# Allegro board CARLA_PCB_1p2.brd
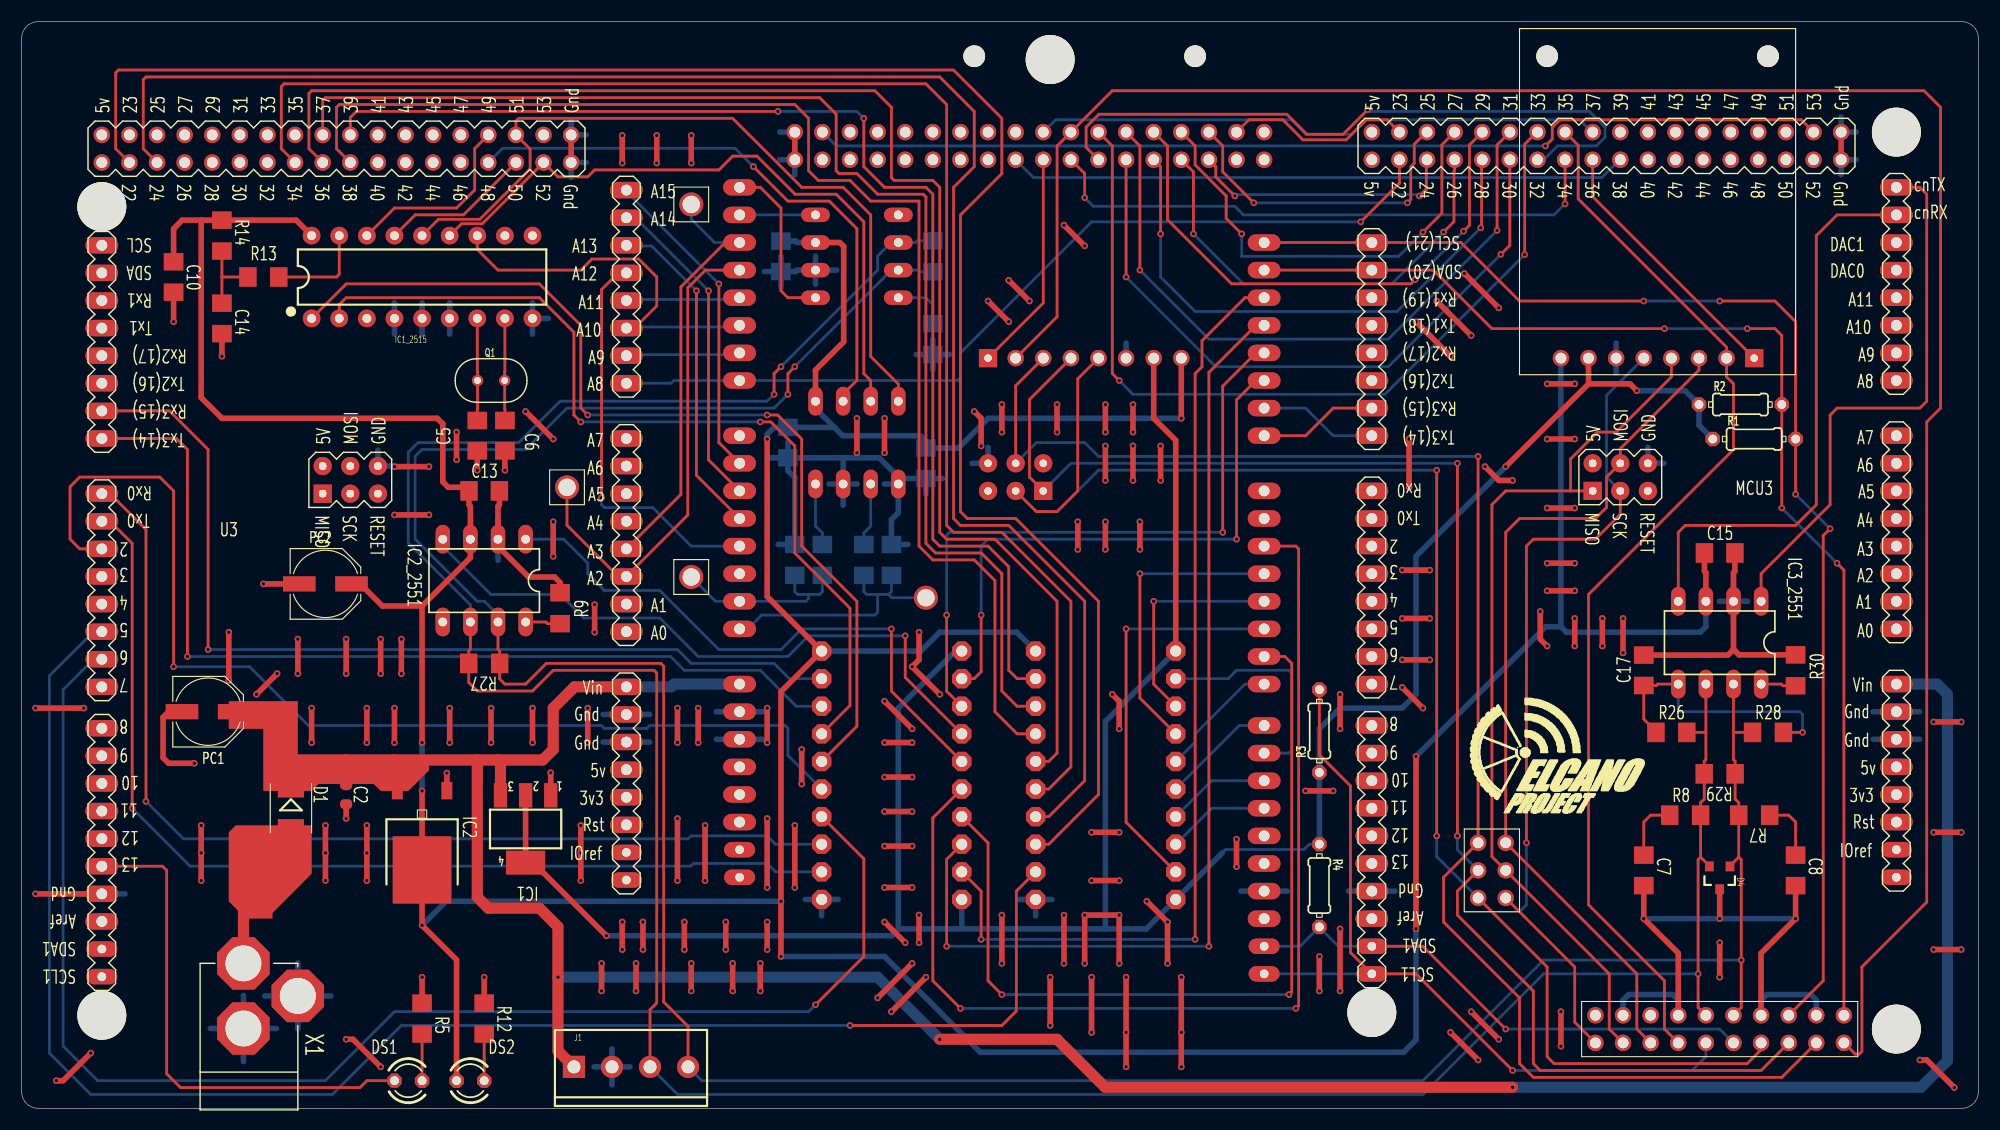
[diagram p0: board, top side]
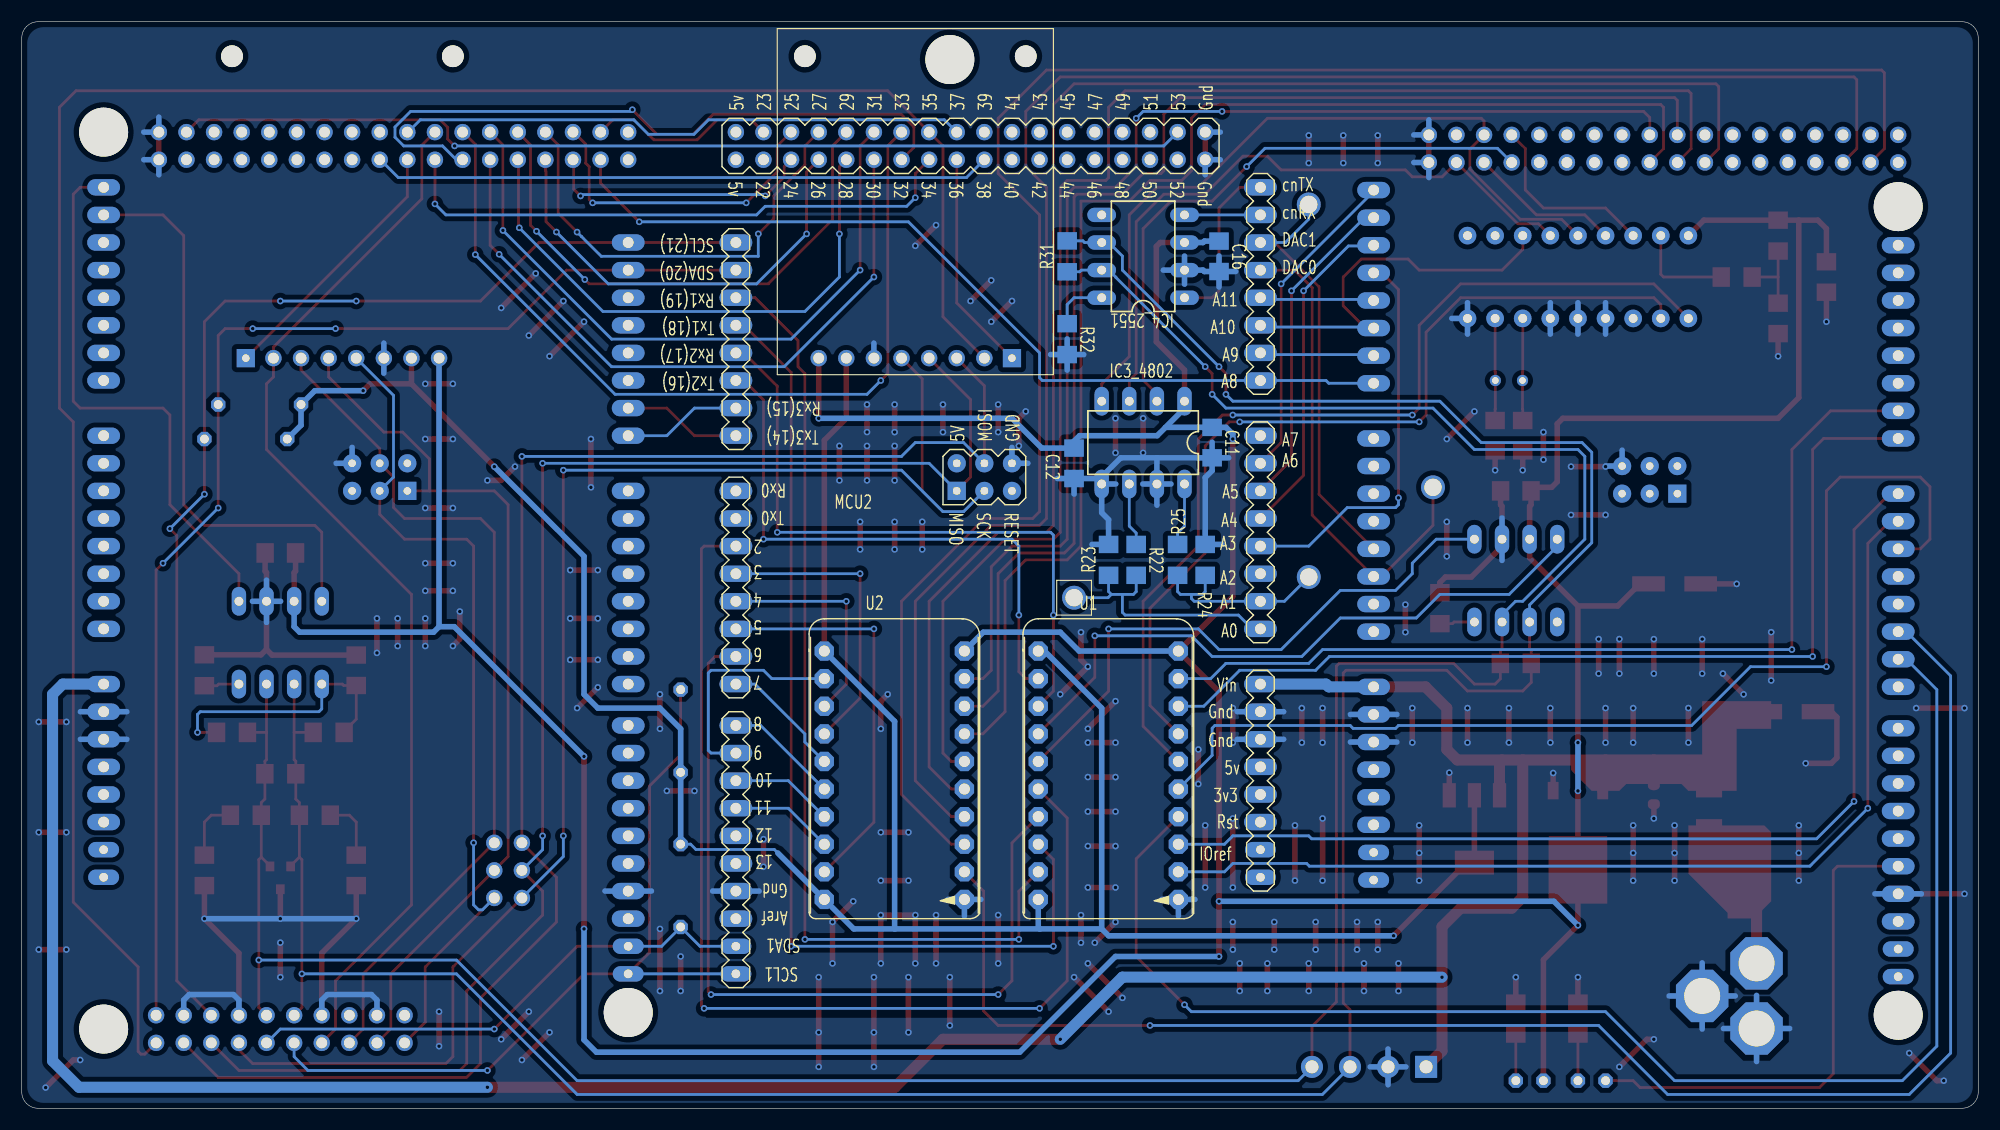
[diagram p1: board, bottom side, seen from below]

Outline 180 x 100 mm; copper layers: TOP, BOTTOM. Coordinates in mm from the lower left corner of the outline.
Outline path: 0,98.5 0,1.5 arc(0.44,0.44) 1.5,0 178.5,0 arc(179.56,0.44) 180,1.5 180,98.5 arc(179.56,99.56) 178.5,100 1.5,100 arc(0.44,99.56) 0,98.5

## Design rules (mm)
constraint set DEFAULT: min track width 0.254
net group OSCILLATOR: nets OSC1 OSC2
net group SPI_SIGNALS: nets CAN_SS DAC_SS
net group POWER: nets 12V0
nets with their own width: min track width 0.254; nets BRAKE_ON BRAKE_PWM BUZZER CAN_INT CAN_RXD CAN_TXD CANH CANL CS_C5_FRONT CS_C5_REAR CS_GYRO CS_MOUSE D_36 DACA DACB DEBUG_LED DRDY_C DRDY_G EBIKECONTRL EN ESTOP_INT FIX FWDSW GPS_RX GPS_TX HALLPHASEA HALLPHASEB HALLPHASEC I1 I2 INT1 L_SENSE LED LL_SCK MISO MOSI N00469 N35866 N35982 N35986 NPD PPS R_BRAKE_ON R_BRAKE_PWM R_BUZZER R_D_36 R_DACA R_DACB R_FWDSW R_REGEN_ACTIVE R_REVERSE R_RX1 R_RX3 R_SENSE R_STEER_PWM R_TX1 R_TX3 R_VOLTAGE_SWITCH R_WATCHDOG REGEN_ACTIVE REVERSE RS RX0 RX3 SCL1 SDA1 SPEEDOMETER SPI_SS STEER_SERVO_PWM TX0 TX3 VOLTAGE_SWITCH WATCHDOG WHEELROTATION

## Placement (name value [footprint] x y rotation side)
C2  100n  [C0603-ROUND]  29.84 28.88 270 top
C5  33pF  [C1206]  41.91 61.9 270 top
C6  33pF  [C1206]  44.45 61.9 270 top
C7  560pF  [C1206]  149.22 21.89 270 top
C8  560pF  [C1206]  163.19 21.89 270 top
C10  0.1uF  [C1206]  13.97 76.5 270 top
C11  0.1uF  [C1206]  70.48 61.27 270 bottom
C12  0.1uF  [C1206]  83.19 59.36 270 bottom
C13  0.1uF  [C1206]  42.55 56.82 0 top
C14  0.1uF  [C1206]  18.41 72.69 270 top
C15  0.1uF  [C1206]  156.21 51.1 0 top
C16  0.1uF  [C1206]  69.85 78.41 270 bottom
C17  4700pF  [C1206]  149.22 40.31 90 top
D1  M7  [SMB]  24.77 27.61 270 top
D4  PESD1CAN  [SPARKFUN-DISCRETESEMI_SOT23-3]  156.21 21.26 180 top
DS1  N_A  [LED3MM]  35.56 2.54 0 top
DS2  N_A  [LED3MM]  41.27 2.54 0 top
IC1  MC33269ST-3.3T3G  [SOT223]  46.35 25.7 180 top
IC1_2515  MCP2515  [DIP18]  36.83 76.5 0 top
IC2  MC33269DT-5.0G  [DPACK]  36.83 24.43 180 top
IC2_2551  MCP2551DIL08  [IC-PACKAGE_DIL08]  42.55 48.56 180 top
IC3_2551  MCP2551DIL08  [IC-PACKAGE_DIL08]  156.21 42.85 180 top
IC3_4802  MCP4802  [DIL08]  76.83 61.27 0 bottom
IC4_2551  MCP2551DIL08  [IC-PACKAGE_DIL08]  76.83 78.41 90 bottom
J1  N_A  [SCREWTERMINAL-3_5MM-4]  50.8 3.81 0 top
J2  PicoScope  [HDR-2X10]  156.21 7.29 90 top
JP2  PINHD-2X3  [HDR-2X3]  135.25 21.89 0 top
MCU2  -  [DUE_NORMAL_]  83.82 68.25 90 bottom
MCU3  -  [DUE_NORMAL_]  154.69 68.25 90 top
NOREF  -  [unnamed]  124.21 8.81 0 top
NOREF#2  -  [unnamed]  94.61 96.52 0 top
NOREF#3  -  [unnamed]  7.37 82.98 0 top
NOREF#4  -  [unnamed]  172.47 7.29 0 top
NOREF#5  -  [unnamed]  7.37 8.56 0 top
NOREF#6  -  [unnamed]  172.47 89.84 0 top
PC1  47u  [PANASONIC_D]  17.14 36.5 0 top
PC2  47u  [PANASONIC_D]  27.94 48.26 0 top
Q1  16MHz  [XTAL_ECS-160-20-46X]  43.18 66.98 0 top
R1  4.7 k  [0204_7]  159.38 61.59 0 top
R2  4.7 k  [0204_7]  158.12 64.77 0 top
R3  4.7 k  [0204_7]  119.38 34.72 90 top
R4  4.7 k  [0204_7]  119.38 20.5 270 top
R5  1K  [R1206]  36.83 8.26 270 top
R7  100  [R1206]  159.38 26.98 180 top
R8  100  [R1206]  153.03 26.98 0 top
R9  4.7K  [R1206]  49.53 46.02 90 top
R12  1K  [R1206]  42.55 8.26 270 top
R13  1K  [R1206]  22.23 76.5 180 top
R14  20K  [R1206]  18.41 80.31 270 top
R22  2.2K  [R1206]  77.47 50.47 270 bottom
R23  3.3K  [R1206]  80.01 50.47 90 bottom
R24  2.2K  [R1206]  73.66 50.47 270 bottom
R25  3.3K  [R1206]  71.12 50.47 90 bottom
R26  60  [R1206]  151.76 34.59 0 top
R27  120  [R1206]  42.55 40.95 180 top
R28  60  [R1206]  160.66 34.59 0 top
R29  120  [R1206]  156.21 30.79 180 top
R30  4.7K  [R1206]  163.19 40.31 90 top
R31  120  [R1206]  83.82 78.41 90 bottom
R32  4.7K  [R1206]  83.82 70.79 270 bottom
SD1  Micro-SD-Breakout  [ADA-MICROSD]  150.5 99.36 270 top
SD2  Micro-SD-Breakout  [ADA-MICROSD]  97.79 99.36 270 bottom
TP0  -  [TH_TP]  50.16 57.15 0 top
TP1  -  [TH_TP]  61.59 83.19 0 top
TP3  -  [TH_TP]  83.19 46.99 180 bottom
TP4  -  [TH_TP]  61.59 48.9 0 top
U1  LLSHIFTER  [ELSHIFTER]  81.28 17.45 180 bottom
U2  LLSHIFTER  [ELSHIFTER]  100.97 17.45 180 bottom
U3  ADUMEGA2560  [MEGA2560]  37.85 68 90 top
X1  DC21MMX  [DC-21MM]  20.32 6.99 180 top

## Library data of the parts
C2 = C-EU_0603-RND
C5-C8 C10-C17 = C-US_C1206
D1 = DIODE-_SMB_0
D4 = PESD1CAN
DS1 DS2 = LED_3MM
IC1 = MC33269STJ_1
IC1_2515 = MCP2515PMCP2510F_P_0
IC2 = MC33269KJ_D_1
IC2_2551 IC3_2551 IC4_2551 = MCP2551_DIL08_0
IC3_4802 = DIL8
J1 = CONN_04_SCREW_0
J2 = Header-2x10_2
JP2 = PINHD-2X3_0
MCU2 MCU3 = DUEPNORMALF_1
PC1 PC2 = CPOL-EU_D_1
Q1 = ECS-160-20-46X
R1-R4 = R-US__0204B7
R5 R7-R9 R12-R14 R22-R32 = R-US__R1206
SD1 SD2 = Micro-SD-Breakout
TP0 TP1 TP3 TP4 = TH_TP_1
U1 U2 = ELSHIFTER
U3 = ADUMEGA2560_4
X1 = DC21MM_0

## Footprints (pads in the part's own frame, mm; a bottom-side part is the same pattern mirrored in y, then rotated)
0204_7
  rrect 1.321x1.321 hole 0.813: 1(-3.81,0) 2(3.81,0)
ADA-MICROSD
  round 2 hole 2 unplated: (2.54,10.16) (2.54,-10.16)
  rect 1.676x1.676 hole 0.7: 1(30.326,8.89)
  round 1.508 hole 1: 2(30.326,6.35) 3(30.326,3.81) 4(30.326,1.27) 5(30.326,-1.27) 6(30.326,-3.81) 7(30.326,-6.35) 8(30.326,-8.89)
C0603-ROUND
  custom 0.898x1.1 smd: 1(-0.889,0) 2(0.889,0)
C1206
  rect 1.6x1.8 smd: 1(-1.4,0) 2(1.4,0)
DC-21MM
  rrect 4.826x4.826 hole 3.302: 1(-5.08,-3.353) 2(-0.076,-6.35) 3(-0.076,-0.356)
DIL08
  oval 1.321x2.642 hole 0.813: 1(-3.81,-3.81) 2(-1.27,-3.81) 3(1.27,-3.81) 4(3.81,-3.81) 5(3.81,3.81) 6(1.27,3.81) 7(-1.27,3.81) 8(-3.81,3.81)
DIP18
  round 1.626 hole 0.813: 1(-10.16,-3.81) 2(-7.62,-3.81) 3(-5.08,-3.81) 4(-2.54,-3.81) 5(0,-3.81) 6(2.54,-3.81) 7(5.08,-3.81) 8(7.62,-3.81) 9(10.16,-3.81) 10(10.16,3.81) 11(7.62,3.81) 12(5.08,3.81) 13(2.54,3.81) 14(0,3.81) 15(-2.54,3.81) 16(-5.08,3.81) 17(-7.62,3.81) 18(-10.16,3.81)
DPACK
  rect 1x1.6 smd: 1(-2.28,-4.8) 3(2.28,-4.8)
  rect 5.4x6.2 smd: 2(0,2.5)
DUE_NORMAL_
  oval 1.508x3.016 hole 1: 2(-16.51,30.48) 3(-19.05,30.48) 3V3(-39.37,-17.78) 4(-21.59,30.48) 5(-24.13,30.48) 5V(-36.83,-17.78) 6(-26.67,30.48) 7(-29.21,30.48) 8(-33.02,30.48) 9(-35.56,30.48) 10(-38.1,30.48) 11(-40.64,30.48) 12(-43.18,30.48) 13(-45.72,30.48) A0(-24.13,-17.78) A1(-21.59,-17.78) A2(-19.05,-17.78) A3(-16.51,-17.78) A4(-13.97,-17.78) A5(-11.43,-17.78) A6(-8.89,-17.78) A7(-6.35,-17.78) A8(-1.27,-17.78) A9(1.27,-17.78) A10(3.81,-17.78) A11(6.35,-17.78) AREF(-50.8,30.48) CANRX(13.97,-17.78) CANTX(16.51,-17.78) DAC0(8.89,-17.78) DAC1(11.43,-17.78) GND1(-48.26,30.48) GND_1(-34.29,-17.78) GND_2(-31.75,-17.78) RESET(-41.91,-17.78) RX0(-11.43,30.48) RX1(6.35,30.48) RX2(1.27,30.48) RX3(-3.81,30.48) SCL(11.43,30.48) SDA(8.89,30.48) TX0(-13.97,30.48) TX1(3.81,30.48) TX2(-1.27,30.48) TX3(-6.35,30.48) VIN(-29.21,-17.78)
  round 1.508 hole 1: 5V_A(19.05,30.48) 5V_B(21.59,30.48) 22(19.05,27.94) 23(21.59,27.94) 24(19.05,25.4) 25(21.59,25.4) 26(19.05,22.86) 27(21.59,22.86) 28(19.05,20.32) 29(21.59,20.32) 30(19.05,17.78) 31(21.59,17.78) 32(19.05,15.24) 33(21.59,15.24) 34(19.05,12.7) 35(21.59,12.7) 36(19.05,10.16) 37(21.59,10.16) 38(19.05,7.62) 39(21.59,7.62) 40(19.05,5.08) 41(21.59,5.08) 42(19.05,2.54) 43(21.59,2.54) 44(19.05,0) 45(21.59,0) 46(19.05,-2.54) 47(21.59,-2.54) 48(19.05,-5.08) 49(21.59,-5.08) 50(19.05,-7.62) 51(21.59,-7.62) 52(19.05,-10.16) 53(21.59,-10.16) GND_A(19.05,-12.7) GND_B(21.59,-12.7)
  round 1.676 hole 0.7: 5V_ICSP(-8.89,10.16) GND_ICSP(-8.89,5.08) MOSI_ICSP(-8.89,7.62) RESET_ICSP(-11.43,5.08) SCK_ICSP(-11.43,7.62)
  oval 1.422x2.845 hole 0.8: IOREF(-44.45,-17.78) NC(-46.99,-17.78) SCL1(-55.88,30.48) SDA1(-53.34,30.48)
  rect 1.676x1.676 hole 0.7: MISO_ICSP(-11.43,10.16)
ELSHIFTER
  rrect 1.778x1.778 hole 1.016: 1(-5.2,24.63) 2(-5.2,22.09) 3(-5.2,19.55) 4(-5.2,17.01) 5(-5.2,14.47) 6(-5.2,11.93) 7(-5.2,9.39) 8(-5.2,6.85) 9(-5.2,4.31) 10(-5.2,1.77) 11(7.69,24.63) 12(7.69,22.09) 13(7.69,19.55) 14(7.69,17.01) 15(7.69,14.47) 16(7.69,11.93) 17(7.69,9.39) 18(7.69,6.85) 19(7.69,4.31) 20(7.69,1.77)
HDR-2X3
  round 1.508 hole 1: 1(-1.27,2.54) 2(1.27,2.54) 3(-1.27,0) 4(1.27,0) 5(-1.27,-2.54) 6(1.27,-2.54)
HDR-2X10
  round 1.508 hole 1: 1(-1.27,11.43) 2(1.27,11.43) 3(-1.27,8.89) 4(1.27,8.89) 5(-1.27,6.35) 6(1.27,6.35) 7(-1.27,3.81) 8(1.27,3.81) 9(-1.27,1.27) 10(1.27,1.27) 11(-1.27,-1.27) 12(1.27,-1.27) 13(-1.27,-3.81) 14(1.27,-3.81) 15(-1.27,-6.35) 16(1.27,-6.35) 17(-1.27,-8.89) 18(1.27,-8.89) 19(-1.27,-11.43) 20(1.27,-11.43)
IC-PACKAGE_DIL08
  oval 1.321x2.642 hole 0.813: 1(-3.81,-3.81) 2(-1.27,-3.81) 3(1.27,-3.81) 4(3.81,-3.81) 5(3.81,3.81) 6(1.27,3.81) 7(-1.27,3.81) 8(-3.81,3.81)
LED3MM
  rrect 1.321x1.321 hole 0.813: A(-1.27,0) K(1.27,0)
MEGA2560
  oval 1.508x3.016 hole 1: 2(-16.51,30.48) 3(-19.05,30.48) 3V3(-39.37,-17.78) 4(-21.59,30.48) 5(-24.13,30.48) 5V_1(-36.83,-17.78) 6(-26.67,30.48) 7(-29.21,30.48) 8(-33.02,30.48) 9(-35.56,30.48) 10(-38.1,30.48) 11(-40.64,30.48) 12(-43.18,30.48) 13(-45.72,30.48) 20(8.89,30.48) 21(11.43,30.48) A0(-24.13,-17.78) A1(-21.59,-17.78) A2(-19.05,-17.78) A3(-16.51,-17.78) A4(-13.97,-17.78) A5(-11.43,-17.78) A6(-8.89,-17.78) A7(-6.35,-17.78) A8(-1.27,-17.78) A9(1.27,-17.78) A10(3.81,-17.78) A11(6.35,-17.78) A12(8.89,-17.78) A13(11.43,-17.78) A14(13.97,-17.78) A15(16.51,-17.78) AREF(-50.8,30.48) GND_1(-34.29,-17.78) GND_2(-31.75,-17.78) GND_5(-48.26,30.48) RESET(-41.91,-17.78) RX0(-11.43,30.48) RX1(6.35,30.48) RX2(1.27,30.48) RX3(-3.81,30.48) TX0(-13.97,30.48) TX1(3.81,30.48) TX2(-1.27,30.48) TX3(-6.35,30.48) VIN(-29.21,-17.78)
  round 1.508 hole 1: 5V_2(19.05,30.48) 5V_3(21.59,30.48) 22(19.05,27.94) 23(21.59,27.94) 24(19.05,25.4) 25(21.59,25.4) 26(19.05,22.86) 27(21.59,22.86) 28(19.05,20.32) 29(21.59,20.32) 30(19.05,17.78) 31(21.59,17.78) 32(19.05,15.24) 33(21.59,15.24) 34(19.05,12.7) 35(21.59,12.7) 36(19.05,10.16) 37(21.59,10.16) 38(19.05,7.62) 39(21.59,7.62) 40(19.05,5.08) 41(21.59,5.08) 42(19.05,2.54) 43(21.59,2.54) 44(19.05,0) 45(21.59,0) 46(19.05,-2.54) 47(21.59,-2.54) 48(19.05,-5.08) 49(21.59,-5.08) 50(19.05,-7.62) 51(21.59,-7.62) 52(19.05,-10.16) 53(21.59,-10.16) GND_3(19.05,-12.7) GND_4(21.59,-12.7)
  round 1.676 hole 0.7: 5V_ICSP(-8.89,10.16) GND_ICSP(-8.89,5.08) MOSI_ICSP(-8.89,7.62) RESET_ICSP(-11.43,5.08) SCK_ICSP(-11.43,7.62)
  oval 1.422x2.845 hole 0.8: IOREF(-44.45,-17.78) NC(-46.99,-17.78) SCL(-55.88,30.48) SDA(-53.34,30.48)
  rect 1.676x1.676 hole 0.7: MISO_ICSP(-11.43,10.16)
PANASONIC_D
  rect 3x1.4 smd: +(2.4,0) -(-2.4,0)
R1206
  rect 1.6x1.8 smd: 1(-1.422,0) 2(1.422,0)
SCREWTERMINAL-3_5MM-4
  rect 2.032x2.032 hole 1.2: 1(0,0)
  round 2.032 hole 1.2: 2(3.5,0) 3(7,0) 4(10.5,0)
SMB
  rect 2.4x2.4 smd: A(2.2,0) C(-2.2,0)
SOT223
  rect 1.219x2.235 smd: 1(-2.311,-3.099) 2(0,-3.099) 3(2.311,-3.099)
  rect 3.6x2.2 smd: 4(0,3.099)
SPARKFUN-DISCRETESEMI_SOT23-3
  rect 0.8x0.9 smd: 1(-0.95,-1) 2(0.95,-1) 3(0,1.1)
TH_TP
  round 2.2 hole 1.6: 1(0,0)
unnamed
  round 4.5 hole 4.5 unplated: (0,0)
XTAL_ECS-160-20-46X
  round 1.03 hole 0.63: 1(-1.25,0) 2(1.25,0)

## Nets
3V3: IC1.2(VOUT2) IC1.4 R1.1 R2.1 R3.1 R4.1 SD1.7 SD2.7 U1.1 U1.10 U2.1 U2.10
5V0: C10.1 C11.1 C12.1 C13.1 C15.1 C16.1 DS2.A IC1_2515.18 IC2.2(VOUT) IC2_2551.3 IC3_2551.3 IC3_4802.1 IC4_2551.3 PC2.+ R14.1 SD1.8 SD2.8 U1.11(VCCB) U2.11(VCCB)
12V0: C2.1 D1.C IC1.3 IC2.3 J1.1 MCU2.VIN MCU3.VIN PC1.+ U3.VIN
GND: C2.2 C5.2 C6.2 C7.2 C8.2 C10.2 C11.2 C12.2 C13.2 C14.2 C15.2 C16.2 C17.2 D4.3 IC1.1 IC1_2515.4 IC1_2515.5 IC1_2515.6 IC1_2515.9(VSS) IC2.1 IC2_2551.2(VSS) IC3_2551.2(VSS) IC3_4802.5 IC3_4802.7 IC4_2551.2(VSS) J1.2 J2.4 J2.8 J2.14 J2.18(GND4) MCU2.GND1 MCU2.GND_1 MCU2.GND_2 MCU2.GND_A MCU2.GND_B MCU2.GND_ICSP MCU3.GND1 MCU3.GND_1 MCU3.GND_2 MCU3.GND_A MCU3.GND_B MCU3.GND_ICSP PC1.- PC2.- R5.1 R9.2 R12.1 R23.2 R25.2 R30.2 R32.2 SD1.6(GND) SD2.6(GND) U1.20 U2.20 U3.GND_1 U3.GND_2 U3.GND_3 U3.GND_4 U3.GND_5 U3.GND_ICSP X1.1 X1.3
BRAKE_ON: U2.12 U3.39
BRAKE_PWM: U1.16 U3.2
BUZZER: U2.14 U3.38
CAN_INT: IC1_2515.12 MCU2.A10 U3.A10
CAN_RXD: IC1_2515.2 U1.14
CAN_SS: IC1_2515.16 U3.49
CAN_TXD: IC1_2515.1 U1.15
CAN_VREF: C17.1 IC3_2551.5 R26.1 R28.2
CANH: D4.1 IC2_2551.7 IC3_2551.7 IC4_2551.7 J1.4 J2.12 R7.2 R27.1 R28.1 R29.1 R31.1
CANL: D4.2 IC2_2551.6 IC3_2551.6 IC4_2551.6 J1.3 J2.10 R8.2 R26.2 R27.2 R29.2 R31.2
CD_HL: MCU3.36 SD1.1
CD_ROUTER: MCU2.36 SD2.1
CS_C5_FRONT: MCU2.37 MCU3.37
CS_C5_REAR: MCU2.38 MCU3.38
CS_GYRO: MCU2.25 MCU3.25
CS_MOUSE: MCU2.32 MCU3.32
CS_SD_HL: J2.7 MCU3.35 SD1.2
CS_SD_ROUTER: J2.19 MCU2.35 SD2.2
D_36: U2.15 U3.36
DAC_SS: IC3_4802.2 U3.48
DACA: IC3_4802.8 R24.1
DACB: IC3_4802.6 R22.1
DEBUG_LED: DS1.A U3.13
DRDY_C: MCU2.26 MCU3.26
DRDY_G: MCU2.24 MCU3.24
EBIKECONTRL: MCU2.A4 U3.A13
EN: MCU2.31 MCU3.31
ESTOP_INT: MCU2.A9 U3.A9
FIX: MCU2.30 MCU3.30
FWDSW: U2.16 U3.34
GPS_RX: MCU2.RX3 MCU3.TX3
GPS_TX: MCU2.TX3 MCU3.RX3
HALLPHASEA: MCU2.A6 U3.A15
HALLPHASEB: MCU2.A5 U3.A14
HALLPHASEC: MCU2.A3 U3.A12
HL-CANRX: IC3_2551.4 MCU3.CANRX
HL-CANTX: IC3_2551.1 MCU3.CANTX
I1: MCU2.27 MCU3.27
I2: MCU2.28 MCU3.28
INT1: MCU2.23 MCU3.23
L_SENSE: MCU2.DAC0 TP0.1 U3.A2
LED: MCU2.34 MCU3.34
LL-CANRX: IC2_2551.4 U1.4
LL-CANTX: IC2_2551.1 U1.5
LL_SCK: IC1_2515.13 IC3_4802.3 U3.52
MISO: IC1_2515.15 U3.50
MISO_HL: J2.3 JP2.4 MCU3.MISO_ICSP SD1.4
MISO_ROUTER: J2.15 JP2.3 MCU2.MISO_ICSP SD2.4
MOSI: IC1_2515.14 IC3_4802.4 U3.51
MOSI_HL: J2.5 JP2.2 MCU3.MOSI_ICSP SD1.3
MOSI_ROUTER: J2.17 JP2.1 MCU2.MOSI_ICSP SD2.3
NPD: MCU2.33 MCU3.33
OSC1: C6.1 IC1_2515.8 Q1.2
OSC2: C5.1 IC1_2515.7 Q1.1
PPS: MCU2.29 MCU3.29
PWRIN: D1.A X1.2
R_BRAKE_ON: MCU2.9 U2.2
R_BRAKE_PWM: MCU2.2 U1.6
R_BUZZER: MCU2.3 U2.4
R_D_36: MCU2.7 U2.5
R_DACA: MCU2.A1 R24.2 R25.1 TP4.1
R_DACB: MCU2.A0 R22.2 R23.1 TP3.1
R_FWDSW: MCU2.8 U2.6
R_REGEN_ACTIVE: MCU2.11 U2.8
R_REVERSE: MCU2.10 U2.7
R_RX1: MCU2.RX1 U1.9
R_RX3: MCU2.RX2 U1.3
R_SENSE: MCU2.DAC1 TP1.1 U3.A3
R_STEER_PWM: MCU2.6 U1.7
R_TX1: MCU2.TX1 U1.8
R_TX3: MCU2.TX2 U1.2
R_VOLTAGE_SWITCH: MCU2.4 U2.3
R_WATCHDOG: MCU2.5 U2.9
REGEN_ACTIVE: U2.18 U3.22
REVERSE: U2.17 U3.24
RS: IC1_2515.17 R13.1
RT-CANRX: IC4_2551.4 MCU2.CANRX
RT-CANTX: IC4_2551.1 MCU2.CANTX
RX0: U1.18 U3.RX0
RX3: U1.12 U3.RX3
SCK_HL: J2.1 JP2.6 MCU3.SCK_ICSP SD1.5
SCK_ROUTER: J2.13 JP2.5 MCU2.SCK_ICSP SD2.5
SCL: J2.16 MCU2.SCL MCU3.SCL R1.2
SCL1: J2.9 MCU2.SCL1 MCU3.SCL1 R3.2
SDA: J2.20 MCU2.SDA MCU3.SDA R2.2
SDA1: J2.11 MCU2.SDA1 MCU3.SDA1 R4.2
SPEEDOMETER: MCU2.A11 U3.A11
SPI_SS: MCU2.53 MCU3.53
STEER_SERVO_PWM: U1.17 U3.6
TX0: U1.19 U3.TX0
TX3: U1.13 U3.TX3
VOLTAGE_SWITCH: U2.13 U3.37
WATCHDOG: U2.19 U3.5
WHEELROTATION: MCU2.A8 MCU3.22 U3.A8
N00469: C14.1 R13.2 R14.2
N00471: DS2.K(C) R12.2
N00472: DS1.K(C) R5.2
N35866: IC2_2551.8 R9.1
N35982: C8.1 R7.1
N35986: C7.1 R8.1
N38622: IC3_2551.8 R30.1
N38835: IC4_2551.8 R32.1

Pads without a net: IC1_2515 3 10 11; IC2_2551 5; IC4_2551 5; J2 2 6; MCU2 3V3 5V 5V_A 5V_B 5V_ICSP 12 13 22 39 40 41 42 43 44 45 46 47 48 49 50 51 52 A2 A7 AREF IOREF NC RESET RESET_ICSP RX0 TX0; MCU3 2 3 3V3 4 5 5V 5V_A 5V_B 5V_ICSP 6 7 8 9 10 11 12 13 39 40 41 42 43 44 45 46 47 48 49 50 51 52 A0 A1 A2 A3 A4 A5 A6 A7 A8 A9 A10 A11 AREF DAC0 DAC1 IOREF NC RESET RESET_ICSP RX0 RX1 RX2 TX0 TX1 TX2; U3 3 3V3 4 5V_1 5V_2 5V_3 5V_ICSP 7 8 9 10 11 12 20 21 23 25 26 27 28 29 30 31 32 33 35 40 41 42 43 44 45 46 47 53 A0 A1 A4 A5 A6 A7 AREF IOREF MISO_ICSP MOSI_ICSP NC RESET RESET_ICSP RX1 RX2 SCK_ICSP SCL SDA TX1 TX2

## Via types
v1: diameter 0.61, hole 0.33, TOP to BOTTOM, 353 vias

## Routing (per net, layer and track width the routed paths; a pad name or vN(x,y) marks a point on that pad's centre or on a via; arc(x,y) is an arc through that point)
3V3: length 245.6
  TOP w0.508: U2.1 106.17,61.48 104.14,63.5 104.14,69.04 ; 144.15,66.67 147.96,66.67 v1(148.59,66.04) ; 144.15,66.67 v1(136.52,59.05) ; 144.15,66.67 144.15,69.04 ; v1(53.79,15.88) 47.05,22.61 IC1.4 IC1.2
  BOTTOM w0.254: 110.44,23.5 110.76,23.82 117.97,23.82 118.47,24.31 R4.1
  BOTTOM w0.508: 99.69,16.51 86.36,16.51 ; 99.69,16.51 99.69,35.61 U2.1 ; 99.69,16.51 103.45,16.51 U2.10 110.44,23.5 ; 86.36,16.51 86.48,16.63 U1.10 ; 86.36,16.51 80.64,16.51 ; R1.1 154.31,62.87 R2.1 153.03,66.04 v1(148.59,66.04) ; 80.64,16.51 80.01,15.88 v1(53.79,15.88) ; 80.64,16.51 80.64,36.83 85.89,42.08 U1.1 ; v1(136.52,59.05) 128.27,50.8 128.27,38.1 127,36.83 121.28,36.83 119.38,34.92 R3.1 R4.1
5V0: length 458.7
  TOP w0.508: v1(36.83,33.66) 36.83,46.23 ; 36.83,46.23 33.17,46.23 31.14,48.26 PC2.+ ; 36.83,46.23 41.27,50.67 IC2_2551.3 41.27,55.41 41.15,55.54 C13.1 40.81,57.15 39.24,57.15 38.73,57.66 38.73,62.99 38.23,63.5 18.41,63.5 16.51,65.41 16.51,81.74 ; v1(68.58,61.59) 68.58,47.09 U1.11 69.85,38.34 v1(69.85,19.05) v1(69.85,13.97) ; C10.1 13.97,80.95 14.76,81.74 16.51,81.74 ; 16.51,81.74 R14.1 25.25,81.74 IC1_2515.18 ; v1(36.83,29.21) IC2.2 v1(36.83,16.84) 40.01,13.66 DS2.A ; v1(128.27,16.51) v1(128.27,32.38) ; IC3_4802.1 73.03,67.94 75.62,70.54 75.62,79.32 75.26,79.68 IC4_2551.3 ; C15.1 154.81,49.43 154.94,49.3 IC3_2551.3 ; v1(106.68,63.5) 106.68,69.04
  BOTTOM w0.508: v1(128.27,32.38) 140.21,44.32 141.6,44.32 ; U1.11 82.72,42.08 84.45,43.81 91.54,43.81 U2.11 ; 74.77,62.66 75.54,61.9 82.68,61.9 83.19,61.39 C12.1 86.16,60.76 88.9,63.5 v1(106.68,63.5) ; 74.77,62.66 C11.1 69.2,62.66 68.58,62.04 v1(68.58,61.59) ; 74.77,62.66 73.03,64.41 IC3_4802.1 ; IC3_2551.3 154.94,44.32 154.43,43.81 142.11,43.81 141.6,44.32 ; v1(69.85,19.05) 39.04,19.05 v1(36.83,16.84) ; v1(69.85,13.97) 79.38,13.97 88.19,5.16 127.13,5.16 128.27,6.3 v1(128.27,16.51) ; C16.1 71.19,79.81 71.32,79.68 IC4_2551.3 ; 141.6,69.04 141.6,44.32 ; v1(36.83,29.21) v1(36.83,33.66)
12V0: length 272.3
  TOP w1.016: v1(137.16,1.93) 99.67,1.93 95.25,6.35 v1(84.45,6.35) ; 34.29,32.05 34.55,31.8 IC2.3 ; 34.29,32.05 41.91,32.05 ; 34.29,32.05 29.84,32.05 ; C2.1 29.84,32.05 ; 29.84,32.05 24.77,32.05 ; 24.77,32.05 D1.C ; 24.77,32.05 24.77,34.59 22.86,36.5 PC1.+ ; 43.81,32.05 41.91,32.05 ; 43.81,32.05 44.04,31.83 IC1.3 ; 43.81,32.05 47.93,32.05 48.9,33.02 48.9,36.83 50.85,38.79 U3.VIN ; 41.91,32.05 41.91,19.43 42.93,18.41 47.62,18.41 49.33,16.71 v1(49.33,12.06) 49.33,5.28 J1.1
  BOTTOM w1.016: v1(84.45,6.35) 78.74,12.06 v1(49.33,12.06) ; MCU2.VIN 60.01,39.04 59.75,38.79 U3.VIN ; MCU3.VIN 176.22,39.04 177.16,38.1 177.16,4.37 174.73,1.93 v1(137.16,1.93)
GND: length 739.1
  TOP w0.508: v1(90.17,62.23) v1(90.17,64.77) ; v1(103.5,19.05) v1(105.41,17.14) v1(105.41,13.34) ; v1(98.42,6.99) v1(98.42,12.06) ; v1(37.47,54.61) v1(34.29,54.61) ; v1(142.88,42.55) v1(142.88,45.09) ; v1(82.55,15.24) v1(82.55,17.78) ; v1(79.38,17.14) v1(81.28,15.24) ; v1(106.68,12.06) v1(106.68,6.99) v1(106.68,3.81) ; v1(81.92,34.92) v1(79.38,37.47) ; v1(140.34,61.59) v1(142.88,61.59) ; v1(6.35,5.08) 3.81,2.54 v1(3.17,2.54) ; C17.2 156.97,41.71 157.48,42.22 157.48,42.24 ; v1(62.23,36.83) v1(62.23,33.66) ; 42.55,9.68 v1(42.55,12.06) ; v1(100.97,34.92) 100.97,37.47 v1(100.33,38.1) ; 18.41,71.3 v1(18.41,69.22) ; v1(37.47,59.05) v1(34.29,59.05) ; C15.2 157.61,49.43 157.48,49.3 IC3_2551.2 157.48,42.24 ; v1(88.27,60.96) 88.27,63.5 v1(87.63,64.14) ; v1(132.72,76.83) v1(135.89,73.66) ; PC2.- v1(22.23,48.26) ; v1(31.75,20.95) v1(31.75,23.5) v1(31.75,26.04) ; v1(111.76,24.77) v1(111.76,22.23) ; v1(156.21,15.24) v1(156.21,12.06) ; v1(48.9,61.59) v1(46.35,64.14) ; J2.8 152.4,14.28 v1(149.22,17.45) C7.2 ; v1(60.96,17.14) v1(60.96,14.61) ; PC1.- 13.51,36.5 13.01,35.99 13.01,32.26 13.51,31.75 v1(15.88,31.75) ; v1(139.7,45.72) 139.7,43.18 v1(140.34,42.55) ; v1(102.87,53.98) v1(102.87,51.44) ; v1(51.44,26.04) v1(51.44,23.5) v1(51.44,20.95) ; v1(99.69,60.96) v1(99.69,57.78) ; v1(60.33,26.67) v1(60.33,20.95) ; v1(19.05,39.37) v1(19.05,43.81) ; v1(61.59,10.79) v1(61.59,13.34) ; v1(102.23,64.77) v1(102.23,62.23) ; 157.48,42.24 157.99,41.73 R30.2 ; C8.2 v1(163.19,17.45) 160.02,14.28 J2.14 ; v1(121.28,38.1) v1(121.28,34.92) ; v1(101.6,12.06) v1(101.6,6.99) v1(101.6,3.81) ; v1(120.65,29.21) v1(118.11,29.21) ; v1(141.6,5.71) v1(141.6,8.89) ; v1(71.12,26.04) v1(71.12,20.32) ; v1(128.27,72.39) v1(131.44,69.22) ; v1(104.78,60.96) v1(104.78,57.78) ; v1(33.02,43.18) v1(33.02,40.01) ; v1(82.55,43.81) 82.55,41.27 v1(81.92,40.64) v1(84.45,38.1) ; v1(100.97,20.95) v1(98.42,20.95) ; v1(174.62,4.45) 175.26,4.45 v1(177.8,1.91) ; v1(98.42,25.4) v1(100.97,25.4) ; C13.2 43.95,55.54 43.81,55.41 IC2_2551.2 43.81,51.71 46.63,48.9 49.02,48.9 49.53,48.39 49.53,47.45 ; v1(68.58,26.67) v1(68.58,20.32) ; v1(145.41,45.09) v1(145.41,42.55) ; v1(90.81,72.39) v1(88.9,74.3) ; v1(33.02,3.81) 30.48,6.35 v1(29.84,6.35) ; v1(16.51,20.95) v1(16.51,23.5) v1(16.51,26.04) ; v1(31.75,36.83) v1(31.75,33.66) ; v1(62.87,26.04) v1(62.87,20.95) ; v1(127.64,57.15) v1(127.64,61.59) ; v1(121.28,16.51) v1(121.28,10.79) ; v1(147.32,45.09) v1(147.32,41.91) ; v1(129.54,45.09) v1(127,45.09) ; v1(97.16,53.98) v1(97.16,51.44) ; v1(100.97,13.34) v1(100.97,17.78) v1(97.79,17.78) v1(97.79,13.34) ; v1(46.99,33.66) v1(46.99,36.83) ; v1(175.9,35.56) v1(178.44,35.56) ; v1(81.92,30.48) v1(79.38,30.48) ; v1(58.42,87) v1(58.42,89.53) ; v1(57.15,17.14) v1(57.15,14.61) ; v1(21.59,38.1) v1(23.5,40.01) ; v1(68.58,17.14) v1(68.58,14.61) ; U3.GND_3 U3.GND_4 ; v1(40.01,59.69) v1(40.01,62.23) ; U3.GND_5 v1(1.27,19.74) ; v1(95.25,62.23) v1(95.25,64.77) ; v1(129.54,41.27) v1(127,41.27) ; v1(65.41,13.34) v1(65.41,10.79) ; v1(128.91,36.83) v1(127,38.73) ; v1(99.69,53.98) v1(99.69,51.44) ; v1(52.7,46.35) v1(52.7,43.81) ; v1(61.59,89.53) v1(61.59,87) ; v1(140.34,55.24) v1(142.88,55.24) ; v1(142.88,66.67) v1(140.34,66.67) ; v1(43.18,33.66) v1(43.18,36.83) ; v1(71.75,29.84) v1(71.75,33.02) ; v1(34.29,33.66) v1(34.29,36.83) ; v1(102.23,60.96) v1(102.23,57.78) ; D4.3 v1(156.21,17.45) ; v1(39.37,36.83) v1(39.37,33.66) ; v1(79.38,33.66) v1(81.92,33.66) ; v1(178.44,14.61) v1(175.9,14.61) ; v1(137.16,57.78) 135.89,57.78 v1(134.62,59.05) ; C10.2 v1(13.97,72.39) ; v1(99.69,62.23) v1(99.69,64.77) ; v1(94.61,7.62) v1(94.61,12.06) ; C6.2 v1(44.45,58.73) ; C2.2 v1(29.84,26.67) ; v1(79.38,20.32) v1(81.92,20.32) ; v1(60.33,33.66) v1(60.33,36.83) ; v1(5.71,36.83) v1(1.27,36.83) ; v1(56.52,13.34) v1(56.52,10.79) ; v1(133.99,4.45) v1(131.44,6.99) ; v1(95.89,17.78) v1(95.89,13.34) ; v1(48.67,30.89) IC1.1 ; IC2.1 v1(39.11,30.86) ; v1(27.94,26.04) v1(27.94,23.5) v1(27.94,20.95) ; C5.2 v1(41.91,58.73) ; v1(130.18,74.3) v1(133.35,71.12) ; v1(135.89,6.35) v1(133.35,8.89) ; v1(67.94,13.34) v1(67.94,10.79) ; v1(55.24,17.14) v1(55.24,14.61) ; v1(29.84,43.18) v1(29.84,40.01) ; v1(129.54,49.53) v1(127,49.53) ; MCU3.GND_A MCU3.GND_B ; v1(92.71,74.3) v1(90.81,76.2) ; 36.83,9.68 v1(36.83,12.06) ; v1(76.83,63.5) v1(76.83,60.33) ; v1(53.34,10.79) v1(53.34,13.34) ; v1(48.9,50.8) v1(48.9,53.98) ; v1(78.74,10.16) v1(81.92,13.34) ; v1(80.01,8.89) v1(83.19,12.06) ; v1(90.17,17.78) v1(90.17,13.34) ; v1(142.88,50.16) v1(140.34,50.16) ; v1(79.38,63.5) v1(79.38,60.33) ; v1(81.92,24.13) v1(79.38,24.13) ; v1(79.38,27.3) v1(81.92,27.3) ; v1(140.34,47.62) v1(142.88,47.62) ; v1(119.38,13.97) v1(119.38,10.79) ; v1(55.24,89.53) v1(55.24,87) ; v1(25.4,43.18) v1(25.4,40.01) ; v1(64.77,17.14) v1(64.77,14.61) ; v1(175.9,25.4) v1(178.44,25.4) ; v1(52.07,33.66) v1(52.07,36.83) ; v1(97.79,79.38) v1(95.89,81.28) ; v1(34.92,40.01) v1(34.92,43.18) ; v1(68.58,33.66) v1(68.58,36.83) ; v1(26.67,33.66) v1(26.67,36.83) ; MCU2.GND_A MCU2.GND_B
  BOTTOM w0.508: 74.27,57.45 IC3_4802.7 ; IC3_4802.7 76.86,57.45 ; IC3_4802.7 75.56,59.87 ; IC3_4802.7 75.56,55.5 ; IC4_2551.2 73.03,78.43 ; IC4_2551.2 71.32,77.14 71.19,77.01 C16.2 ; IC4_2551.2 74.98,77.14 ; IC4_2551.2 73.03,75.85 ; 101.6,69.04 101.6,70.42 ; 68.32,77.01 C16.2 ; C16.2 69.85,78.44 ; C16.2 69.85,75.58 ; 34.29,74.14 IC1_2515.4 34.29,71.25 ; 73.59,17.7 U1.20 ; U1.20 75.11,19.22 ; U1.20 72.07,19.22 ; 68.18,33.96 MCU2.GND_1 63.9,33.96 ; R32.2 85.35,69.37 ; R32.2 82.29,69.37 ; R32.2 83.82,70.8 ; R32.2 83.82,67.94 ; 9.51,19.74 U3.GND_5 5.23,19.74 ; J2.8 152.4,9.96 151.89,10.46 147.83,10.46 147.32,9.96 J2.4 ; 69.59,51.89 R25.2 71.12,58.05 70.48,58.68 C11.2 ; 122.07,19.99 MCU3.GND1 126.35,19.99 ; IC3_4802.5 80.64,54.81 80.01,54.18 R23.2 81.54,51.89 ; IC3_4802.5 80.64,58.12 78.9,59.87 75.56,59.87 ; IC3_4802.5 79.35,57.45 ; IC3_4802.5 81.15,57.96 C12.2 ; 17.35,7.34 X1.3 ; X1.3 20.4,4.3 ; X1.3 20.4,10.38 ; X1.3 23.44,7.34 ; 146.69,70.42 146.69,67.65 ; C12.2 84.72,57.96 ; C12.2 83.19,56.53 ; 170.33,36.5 MCU3.GND_2 174.61,36.5 ; 53.49,33.71 U3.GND_1 57.77,33.71 ; v1(149.22,17.45) v1(156.21,17.45) v1(163.19,17.45) ; 43.81,54.33 IC2_2551.2 43.81,50.42 ; U2.20 94.8,19.22 ; U2.20 93.28,17.7 ; U2.20 91.75,19.22 ; X1.1 28.44,10.34 ; X1.1 25.4,13.38 ; X1.1 25.4,7.29 ; X1.1 22.36,10.34 ; 36.83,71.25 IC1_2515.5 36.83,74.14 ; 63.9,36.5 MCU2.GND_2 68.18,36.5 ; 68.95,59.87 C11.2 ; C11.2 70.48,61.3 ; C11.2 75.56,59.87 ; 168.77,89.84 MCU3.GND_B 167.39,91.23 ; 71.12,85.91 MCU2.GND_A 69.73,87.3 ; 46.99,71.25 IC1_2515.9 ; IC1_2515.9 48.43,72.69 ; IC1_2515.9 46.99,74.14 ; 39.37,71.25 IC1_2515.6 39.37,74.14 ; 54.3,2.16 J1.2 ; J1.2 54.3,5.46 ; J1.2 52.65,3.81 ; J1.2 55.95,3.81 ; 32.77,60.58 U3.GND_ICSP 34.24,59.11 ; 50.55,90.97 U3.GND_4 51.93,89.59 ; 69.73,89.84 MCU2.GND_B ; 157.48,44.71 IC3_2551.2 ; IC3_2551.2 156.19,46.66 ; IC3_2551.2 157.48,48.61 ; IC3_2551.2 158.77,46.66 ; 149.61,60.83 MCU3.GND_ICSP 151.08,59.36 ; 53.49,36.25 U3.GND_2 57.77,36.25 ; 170.33,33.96 MCU3.GND_1 174.61,33.96 ; 51.93,87.05 U3.GND_3 50.55,85.66 ; J2.18 165.1,9.96 164.59,10.46 160.53,10.46 160.02,9.96 J2.14 ; 167.39,85.91 MCU3.GND_A 168.77,87.3 ; 88.9,60.83 MCU2.GND_ICSP 87.43,59.36 ; 112.16,19.99 MCU2.GND1 116.44,19.99
BRAKE_ON: length 113.3
  TOP w0.254: U3.39 30.23,91.19 30.79,91.75 v1(69.57,91.75) ; U2.12 91.58,39.54 90.81,40.31 90.81,49.84 88.9,51.74 84.45,51.74 83.82,52.38 83.82,84.12 83.19,84.76 79.38,84.76 77.47,86.67 v1(77.47,91.11)
  BOTTOM w0.254: v1(69.57,91.75) 76.83,91.75 v1(77.47,91.11)
BRAKE_PWM: length 100.7
  TOP w0.254: v1(13.97,40.64) 13.97,56.82 12.7,58.09 5.33,58.09 4.45,57.2 4.45,52.38 5.33,51.49 U3.2
  BOTTOM w0.254: U1.16 70.48,32.48 70.48,34.98 70.23,35.23 57.78,35.23 57.52,34.96 53.61,34.96 53.34,35.23 26.36,35.23 20.95,40.64 v1(13.97,40.64)
BUZZER: length 122.5
  TOP w0.254: U3.38 28.96,88.31 28.96,92.13 29.21,92.38 71.12,92.38 72.39,91.11 72.39,86.28 73.28,85.39 76.2,85.39 78.11,83.49 82.55,83.49 82.55,51.74 83.82,50.47 87.63,50.47 89.53,48.57 89.53,36.5 91.58,34.46 U2.14
CAN_INT: length 36.5
  TOP w0.254: U3.A10 56.38,71.81 58.42,73.85 58.42,76.5 56.77,78.16 52.45,78.16 51.44,77.14 43.81,77.14 41.91,79.05 IC1_2515.12
  BOTTOM w0.254: U3.A10 55.72,71.9 65.88,71.9 MCU2.A10
CAN_RXD: length 83.2
  TOP w0.254: v1(67.94,63.17) 68.91,63.17 71.12,60.96 71.12,51.1 76.2,46.02 76.2,37.07 U1.14 ; v1(51.44,63.17) 50.8,63.8 50.8,71.42 47.62,74.6 29.84,74.6 29.21,73.97 IC1_2515.2
  BOTTOM w0.254: v1(51.44,63.17) v1(67.94,63.17)
CAN_SS: length 17.2
  TOP w0.254: U3.49 41.67,88.33 41.67,84.52 40.01,82.86 34.29,82.86 IC1_2515.16
CAN_TXD: length 89.9
  TOP w0.254: U1.15 76.83,35.16 76.83,46.66 71.75,51.74 71.75,61.59 69.55,63.8 v1(68.58,63.8) ; v1(52.07,63.8) 51.44,64.44 51.44,72.06 47.62,75.87 29.84,75.87 IC1_2515.1
  BOTTOM w0.254: v1(52.07,63.8) v1(68.58,63.8)
CAN_VREF: length 25.3
  TOP w0.254: v1(163.83,34.59) R28.2 ; R26.1 150.34,34.7 149.22,35.81 C17.1 150.38,38.91 150.51,39.04 IC3_2551.5
  BOTTOM w0.254: v1(163.83,34.59) 163.83,36.25 163.58,36.5 152.65,36.5 152.4,36.75 IC3_2551.5
CANH: length 270
  TOP w0.254: v1(70.48,65.71) 70.48,67.61 v1(71.12,68.25) ; D4.1 157.16,22.31 157.96,23.11 ; 157.48,34.59 157.48,32.09 157.63,31.94 R29.1 157.63,28.46 157.96,28.13 R7.2 157.96,23.11 ; 157.48,34.59 R28.1 ; 157.48,34.59 IC3_2551.7 ; 157.96,23.11 158.19,22.88 v1(158.19,13.64) 158.19,9.27 J2.12 ; J1.4 61.3,7.54 59.05,9.79 59.05,40.69 58.8,40.95 48.26,40.95 46.35,39.04 44.45,39.04 43.97,39.52 R27.1 43.97,42.1 43.81,42.25 43.81,44.76
  BOTTOM w0.254: R31.1 82.67,76.99 82.51,77.14 IC4_2551.7 79.98,77.14 79.34,76.49 79.34,76.47 v1(71.12,68.25) ; v1(158.19,13.64) 140,13.64 128.91,2.54 62.57,2.54 J1.4 ; v1(70.48,65.71) 69.22,64.44 50.16,64.44 46.35,60.63 36.83,60.63 36.2,59.99 36.2,52.38 41.91,46.66 42.57,46.66 43.81,45.42 43.81,44.76
CANL: length 272.9
  TOP w0.254: 41.27,44.76 41.27,42.25 41.12,42.1 R27.2 41.12,39.19 41.91,38.41 46.99,38.41 48.9,40.31 58.17,40.31 58.42,40.06 58.42,9.69 57.8,9.07 J1.3 ; J2.10 154.23,9.27 v1(154.23,12.37) 154.23,22.88 154.46,23.11 ; v1(69.85,68.25) 69.22,67.61 v1(69.22,65.71) ; 154.94,34.59 154.94,32.09 154.79,31.94 R29.2 154.79,28.46 154.46,28.13 R8.2 154.46,23.11 ; 154.94,34.59 IC3_2551.6 ; 154.94,34.59 153.19,34.59 ; D4.2 155.26,22.31 154.46,23.11
  BOTTOM w0.254: v1(69.22,65.71) 68.58,65.08 49.53,65.08 45.72,61.27 36.45,61.27 35.56,60.38 35.56,52.04 41.27,46.33 41.27,44.76 ; R31.2 82.37,79.83 82.22,79.68 IC4_2551.6 79.98,79.68 78.74,78.44 78.74,77.14 v1(69.85,68.25) ; J1.3 60.34,1.27 128.91,1.27 140,12.37 v1(154.23,12.37)
CD_HL: length 24.4
  TOP w0.254: 159.38,69.04 144.53,83.9 MCU3.36
CD_ROUTER: length 20.4
  TOP w0.254: MCU2.36 93.98,74.12 88.9,69.04
CS_C5_FRONT: length 52.6
  BOTTOM w0.254: MCU2.37 95.11,90.97 116.82,90.97 118.15,89.64 122.35,89.64 123.69,90.97 143.33,90.97 144.46,89.84 MCU3.37
CS_C5_REAR: length 57
  BOTTOM w0.254: MCU2.38 93.08,85.66 145.36,85.66 147,87.3 MCU3.38
CS_GYRO: length 29.6
  TOP w0.254: MCU2.25 110.49,88.57 110.49,86.19 v1(113.35,83.33) ; MCU3.25 129.22,89.84 128.11,88.73 128.11,86.98 127.79,86.67 127.79,83.65 v1(127.48,83.33)
  BOTTOM w0.254: v1(127.48,83.33) v1(113.35,83.33)
CS_MOUSE: length 62.1
  TOP w0.254: v1(123.83,91.9) 121.56,89.64 118.24,89.64 116.39,91.48 99.1,91.48 97.92,90.31 97.92,88.44 MCU2.32
  BOTTOM w0.254: v1(123.83,91.9) 123.98,91.75 144.23,91.75 145.66,90.31 145.66,89.37 144.86,88.57 141.29,88.57 140.02,87.3 MCU3.32
CS_SD_HL: length 99.2
  TOP w0.254: MCU3.35 143.19,88.63 143.19,83.7 156.84,70.05 156.84,67.31 157.48,66.67 157.48,60.63 144.15,47.3 144.15,18.72 151.13,11.73 151.13,7.29 J2.7
CS_SD_ROUTER: length 197.2
  TOP w0.254: 91.44,69.04 95.25,72.85 95.25,88.57 MCU2.35 100.33,93.65 175.01,93.65 176.53,92.13 176.53,64.44 175.26,63.17 175.26,18.97 169.29,13.01 169.29,5.24 169.04,4.98 168.68,4.98 J2.19
D_36: length 133.9
  TOP w0.254: U2.15 94.48,31.92 95.25,32.69 95.25,46.66 89.53,52.38 85.09,52.38 84.45,53.01 84.45,84.76 83.82,85.39 80.26,85.39 80.01,85.65 80.01,92.13 78.49,93.65 26.67,93.65 26.42,93.4 26.42,88.31 U3.36
DAC_SS: length 53.9
  TOP w0.254: IC3_4802.2 75.56,65.74 76.83,67.01 76.83,80.95 74.3,83.49 70.48,83.49 v1(67.31,86.67)
  BOTTOM w0.254: v1(67.31,86.67) 65.62,88.35 44.23,88.35 U3.48
DACA: length 5.8
  BOTTOM w0.254: IC3_4802.8 73.03,53.58 73.66,52.95 R24.1
DACB: length 5.8
  BOTTOM w0.254: IC3_4802.6 78.11,53.58 77.47,52.95 R22.1
DEBUG_LED: length 46.6
  TOP w0.254: U3.13 12.95,22.28 13.34,21.89 13.34,3.17 14.61,1.91 31.11,1.91 31.75,2.54 DS1.A
DRDY_C: length 41.3
  TOP w0.254: MCU3.26 131.83,86.29 131.76,86.23 131.76,81.6 v1(130.81,80.64) ; MCU2.26 107.79,86.19 v1(107.79,80.47)
  BOTTOM w0.254: v1(130.81,80.64) 126.03,75.87 112.39,75.87 v1(107.79,80.47)
DRDY_G: length 25
  TOP w0.254: MCU3.24 129.22,87.24 129.22,84.6 v1(128.59,83.97) ; MCU2.24 109.86,86.67 109.86,85.71 v1(111.6,83.97)
  BOTTOM w0.254: v1(128.59,83.97) 128.46,84.09 111.73,84.09 v1(111.6,83.97)
EBIKECONTRL: length 30.8
  TOP w0.254: v1(62.07,75.23) 62.07,58.25 MCU2.A4
  BOTTOM w0.254: U3.A13 55.69,79.36 57.94,79.36 v1(62.07,75.23)
EN: length 62.4
  TOP w0.254: v1(102.87,77.14) 102.87,88.57 MCU2.31 ; v1(135.73,80.79) 135.73,88.67 MCU3.31
  BOTTOM w0.254: v1(102.87,77.14) 109.22,70.79 125.73,70.79 v1(135.73,80.79)
ESTOP_INT: length 10.5
  BOTTOM w0.254: U3.A9 55.72,69.36 65.88,69.36 MCU2.A9
FIX: length 62
  TOP w0.254: v1(136.08,78.6) 136.91,79.43 MCU3.30 ; MCU2.30 v1(101.6,76.5)
  BOTTOM w0.254: v1(101.6,76.5) 109.86,68.25 125.73,68.25 v1(136.08,78.6)
FWDSW: length 142
  TOP w0.254: U3.34 23.88,88.31 23.88,94.03 24.13,94.28 83.19,94.28 85.09,92.38 85.09,53.65 85.72,53.01 90.17,53.01 96.52,46.66 96.52,31.42 94.48,29.38 U2.16
GPS_RX: length 11
  BOTTOM w0.254: MCU2.RX3 118.11,64.44 120.65,61.9 MCU3.TX3
GPS_TX: length 11
  TOP w0.254: MCU2.TX3 118.11,61.9 120.65,64.44 MCU3.RX3
HALLPHASEA: length 29.5
  TOP w0.254: MCU2.A6 64.14,61.27 v1(64.14,75.87)
  BOTTOM w0.254: v1(64.14,75.87) 55.63,84.38 U3.A15
HALLPHASEB: length 29.9
  TOP w0.254: v1(63.18,75.23) 63.18,59.68 MCU2.A5
  BOTTOM w0.254: v1(63.18,75.23) 56.52,81.9 55.69,81.9 U3.A14
HALLPHASEC: length 37
  TOP w0.254: v1(53.34,56.19) 53.34,75.35 54.87,76.89 U3.A12
  BOTTOM w0.254: MCU2.A3 61.59,51.74 58.05,55.28 53.61,55.28 53.34,55.55 v1(53.34,56.19)
HL-CANRX: length 53
  TOP w0.254: IC3_2551.4 152.4,53.01 153.03,53.65 163.19,53.65 165.1,55.55 165.1,80.31 167,82.22 MCU3.CANRX
HL-CANTX: length 51.3
  TOP w0.254: IC3_2551.1 160.02,49.2 166.37,55.55 166.37,63.8 167,64.44 174.62,64.44 175.26,65.08 175.26,84.12 174.62,84.76 MCU3.CANTX
I1: length 41.7
  TOP w0.254: MCU2.27 107.95,88.57 107.95,86.82 110.81,83.97 110.81,81.9 v1(112.24,80.47) ; MCU3.27 130.65,88.67 130.65,82.38 v1(128.91,80.64)
  BOTTOM w0.254: v1(128.91,80.64) 128.52,80.24 126.68,78.41 112.24,78.41 v1(112.24,80.47)
I2: length 51.3
  TOP w0.254: MCU2.28 104.78,86.67 v1(104.78,80.47) ; MCU3.28 134.3,87.24 134.3,81.11 v1(134.23,81.04)
  BOTTOM w0.254: v1(104.78,80.47) 104.78,76.5 107.95,73.33 126.52,73.33 v1(134.23,81.04)
INT1: length 17.5
  TOP w0.254: MCU3.23 125.61,90.97 123.69,90.97 121.84,89.13 117.87,89.13 116.02,90.97 112.89,90.97 MCU2.23
L_SENSE: length 45.3
  TOP w0.254: TP0.1 50.16,53.65 54.87,48.95 U3.A2 61.28,54.6 61.28,75.51 62.9,77.14 MCU2.DAC0
LED: length 53.4
  TOP w0.254: MCU2.34 97.79,86.03 v1(97.79,83.81) ; v1(141.99,83.24) MCU3.34
  BOTTOM w0.254: v1(97.79,83.81) 98.58,83.01 111.6,83.01 112.39,82.22 140.97,82.22 v1(141.99,83.24)
LL-CANRX: length 59.4
  TOP w0.254: U1.4 81.28,39.66 v1(81.28,43.48)
  BOTTOM w0.254: v1(81.28,43.48) 72.39,43.48 70.48,41.58 62.23,41.58 58.69,45.12 51.7,45.12 49.53,47.3 43.15,47.3 38.73,51.71 IC2_2551.4
LL-CANTX: length 54.1
  TOP w0.254: U1.5 80.01,38.39 v1(80.01,44.12)
  BOTTOM w0.254: v1(80.01,44.12) 71.75,44.12 69.85,42.22 64.14,42.22 58.69,47.66 53.61,47.66 52.07,49.2 52.07,50.16 49.86,52.38 IC2_2551.1
LL_SCK: length 61.5
  TOP w0.254: IC1_2515.13 40.46,81.41 42.37,81.41 U3.52 49.33,85.72 52.07,85.72 52.7,86.36 64.14,86.36 65.41,87.63 67.64,87.63 71.15,84.12 74.93,84.12 77.47,81.58 77.47,67.61 78.11,66.98 IC3_4802.3
MISO: length 14
  TOP w0.254: U3.50 40.64,82.22 36.2,82.22 IC1_2515.15
MISO_HL: length 81.4
  TOP w0.254: 142.49,56.82 136.53,56.82 135.25,55.55 135.25,23.16 JP2.4 146.05,12.37 146.05,7.29 J2.3 ; 142.49,56.82 142.49,59.77 144.96,62.23 146.69,62.23 151.76,67.31 151.76,69.04 ; 142.49,56.82 MCU3.MISO_ICSP
MISO_ROUTER: length 138
  TOP w0.254: JP2.3 132.08,19.99 132.08,17.78 139.06,10.79 139.06,4.12 139.7,3.48 160.02,3.48 J2.15 ; 96.52,69.04 92.71,65.23 92.71,58.09 MCU2.MISO_ICSP ; v1(132.08,59.36) v1(132.08,25.07)
  BOTTOM w0.254: JP2.3 132.08,23.8 v1(132.08,25.07) ; v1(132.08,59.36) 96.52,59.36 MCU2.MISO_ICSP
MOSI: length 72.1
  TOP w0.254: IC1_2515.14 38.33,81.82 42.14,81.82 46.77,86.45 46.77,88.28 U3.51 45.47,90.86 45.72,91.11 65.41,91.11 71.75,84.76 75.56,84.76 78.11,82.22 78.11,69.19 80.64,66.65 IC3_4802.4
MOSI_HL: length 80
  TOP w0.254: J2.5 148.59,7.29 148.59,12.37 JP2.2 136.53,53.01 137.79,54.28 144.78,54.28 145.8,55.3 145.8,58.09 MCU3.MOSI_ICSP 147.07,60.71 154.31,67.94 154.31,69.04
MOSI_ROUTER: length 143.8
  TOP w0.254: v1(133.99,59.99) JP2.1 130.81,21.26 130.81,17.14 137.79,10.16 137.79,4.12 139.06,2.85 161.93,2.85 J2.17 ; MCU2.MOSI_ICSP 91.44,66.5 93.98,69.04
  BOTTOM w0.254: MCU2.MOSI_ICSP 93.34,61.27 97.79,61.27 99.06,59.99 v1(133.99,59.99)
NPD: length 78.6
  TOP w0.254: v1(100.97,66.98) 100.33,67.61 100.33,88.57 MCU2.33 ; v1(138.27,78.57) 138.27,88.73 139.38,89.84 MCU3.33
  BOTTOM w0.254: v1(100.97,66.98) 102.23,65.71 125.41,65.71 v1(138.27,78.57)
OSC1: length 9.4
  TOP w0.254: IC1_2515.8 44.45,67.77 44.43,67.75 Q1.2 44.43,64.37 44.45,64.35 C6.1
OSC2: length 9.4
  TOP w0.254: IC1_2515.7 41.91,67.77 41.93,67.75 Q1.1 41.93,64.37 41.91,64.35 C5.1
PPS: length 50.1
  TOP w0.254: MCU3.29 133.19,88.67 133.19,81.27 v1(132.64,80.72) ; MCU2.29 105.41,88.57 105.41,81.78 111.31,75.88 127.8,75.88 v1(128.2,76.27)
  BOTTOM w0.254: v1(132.64,80.72) v1(128.2,76.27)
PWRIN: length 13.9
  TOP w1.016: D1.A 24.77,22.58 20.4,18.21 X1.2
R_BRAKE_ON: length 20.9
  BOTTOM w0.254: U2.2 110.99,39.54 111.76,40.31 116.59,40.31 116.84,40.06 116.84,32.94 116.59,32.69 MCU2.9
R_BRAKE_PWM: length 98.9
  TOP w0.254: MCU2.2 117.22,51.74 117.47,51.49 117.47,9.45 v1(117.22,9.2) ; v1(86.36,9.2) 83.82,11.73 83.82,26.72 U1.6
  BOTTOM w0.254: v1(86.36,9.2) v1(117.22,9.2)
R_BUZZER: length 27.5
  TOP w0.254: U2.4 102.87,37.76 v1(102.87,49.2)
  BOTTOM w0.254: MCU2.3 v1(102.87,49.2)
R_D_36: length 11.5
  BOTTOM w0.254: MCU2.7 112.54,39.04 107.95,34.45 107.95,33.7 U2.5
R_DACA: length 18
  BOTTOM w0.254: TP4.1 63.83,46.66 MCU2.A1 72.14,46.66 72.39,46.91 72.39,47.3 ; R24.2 73.66,47.55 73.41,47.3 72.39,47.3 ; 72.39,47.3 71.37,47.3 71.12,47.55 R25.1
R_DACB: length 24.3
  BOTTOM w0.254: TP3.1 80.06,46.99 79.76,47.3 ; 79.76,47.3 80.01,47.55 R23.1 ; 79.76,47.3 78.74,47.3 ; 78.74,47.3 78.74,45.64 78.49,45.39 68.06,45.39 66.79,44.12 MCU2.A0 ; 78.74,47.3 77.72,47.3 77.47,47.55 R22.2
R_FWDSW: length 10.6
  BOTTOM w0.254: U2.6 112.02,35.23 MCU2.8
R_REGEN_ACTIVE: length 9.5
  BOTTOM w0.254: U2.8 109.47,27.61 MCU2.11
R_REVERSE: length 9.5
  BOTTOM w0.254: MCU2.10 109.47,30.15 U2.7
R_RX1: length 89.4
  TOP w0.254: MCU2.RX1 112.54,74.6 108.58,70.65 108.58,68.25 107.95,67.61 v1(107.95,15.54) ; U1.9 88.27,19.98 v1(88.27,15.54)
  BOTTOM w0.254: v1(107.95,15.54) v1(88.27,15.54)
R_RX3: length 60.4
  TOP w0.254: MCU2.RX2 113.55,69.52 110.49,66.46 v1(110.49,53.01) ; U1.3 85.09,38.39 v1(85.09,45.39)
  BOTTOM w0.254: v1(85.09,45.39) 85.09,52.76 85.34,53.01 v1(110.49,53.01)
R_SENSE: length 40
  TOP w0.254: MCU2.DAC1 64.72,79.68 60.64,75.6 60.64,56.5 U3.A3
  BOTTOM w0.254: TP1.1 61.59,81.83 63.75,79.68 MCU2.DAC1
R_STEER_PWM: length 77.7
  TOP w0.254: v1(90.17,10.46) 88.9,11.73 88.9,24.42 U1.7 ; v1(116.59,10.46) 116.84,10.72 116.84,40.95 116.2,41.58 MCU2.6
  BOTTOM w0.254: v1(116.59,10.46) v1(90.17,10.46)
R_TX1: length 93.8
  TOP w0.254: v1(85.09,14.91) 85.09,22.91 U1.8 ; MCU2.TX1 113.55,72.06 109.22,67.73 v1(109.22,14.91)
  BOTTOM w0.254: v1(109.22,14.91) v1(85.09,14.91)
R_TX3: length 53.5
  TOP w0.254: v1(111.76,52.38) 111.76,65.19 113.55,66.98 MCU2.TX2 ; U1.2 87.62,39.54 88.27,40.18 v1(88.27,45.39)
  BOTTOM w0.254: v1(88.27,45.39) 88.27,51.74 88.9,52.38 v1(111.76,52.38)
R_VOLTAGE_SWITCH: length 20.7
  TOP w0.254: v1(104.14,46.66) 104.14,39.02 U2.3
  BOTTOM w0.254: MCU2.4 v1(104.14,46.66)
R_WATCHDOG: length 37
  TOP w0.254: U2.9 101.6,26.32 v1(101.6,44.12)
  BOTTOM w0.254: v1(101.6,44.12) MCU2.5
REGEN_ACTIVE: length 171.6
  TOP w0.254: U3.22 8.64,88.31 8.64,95.3 8.89,95.56 85.72,95.56 90.17,91.11 90.17,86.03 86.36,82.22 86.36,54.91 87,54.28 91.44,54.28 99.06,46.66 99.06,28.88 94.48,24.3 U2.18
REVERSE: length 161.9
  TOP w0.254: U3.24 11.18,88.31 11.18,94.67 11.43,94.92 84.45,94.92 87.63,91.75 87.63,86.67 85.72,84.76 85.72,54.28 86.36,53.65 90.81,53.65 97.79,46.66 97.79,30.15 94.48,26.84 U2.17
RS: length 9.2
  TOP w0.254: IC1_2515.17 29.21,76.76 28.96,76.5 R13.1
RT-CANRX: length 7
  BOTTOM w0.254: MCU2.CANRX IC4_2551.4
RT-CANTX: length 15.7
  TOP w0.254: IC4_2551.1 70.48,74.6 69.85,75.23 69.85,82.86 67.94,84.76 MCU2.CANTX
RX0: length 94.5
  TOP w0.254: v1(11.43,28.25) 11.43,53.26 8.12,56.57 U3.RX0
  BOTTOM w0.254: v1(11.43,28.25) 14.87,24.8 61.33,24.8 61.59,25.07 68.58,25.07 69.35,24.3 U1.18
RX3: length 87.2
  TOP w0.254: U3.RX3 13.59,64.19 17.14,60.63 v1(17.14,42.22)
  BOTTOM w0.254: U1.12 70.62,39.54 69.21,40.95 69.21,40.95 61.59,40.95 60.33,42.22 v1(17.14,42.22)
SCK_HL: length 78.5
  TOP w0.254: v1(138.43,24.43) 138.43,51.74 139.06,52.38 144.78,52.38 147.07,54.66 MCU3.SCK_ICSP ; JP2.6 142.88,13.01 142.88,7.92 J2.1
  BOTTOM w0.254: JP2.6 137.62,18.26 137.97,18.26 138.43,18.72 v1(138.43,24.43) ; MCU3.SCK_ICSP 145.8,58.09 145.8,65.61 149.22,69.04
SCK_ROUTER: length 140.7
  TOP w0.254: v1(130.18,25.07) v1(130.18,58.73) ; JP2.5 140.34,13.01 140.34,4.75 140.97,4.12 158.75,4.12 160.02,5.38 J2.13 ; MCU2.SCK_ICSP 93.34,54.91 95.25,54.91 97.16,56.82 97.16,67.13 99.06,69.04
  BOTTOM w0.254: JP2.5 130.18,23.16 v1(130.18,25.07) ; v1(130.18,58.73) 99.06,58.73 95.25,54.91 93.34,54.91 MCU2.SCK_ICSP
SCL: length 118.6
  TOP w0.254: J2.16 165.74,11.73 165.74,52.7 v1(166.37,53.34) ; v1(149.22,74.3) 137.79,74.3 132.41,79.68 MCU3.SCL MCU2.SCL ; v1(163.19,56.52) R1.2 163.19,72.39 161.29,74.3 v1(156.21,74.3)
  BOTTOM w0.254: v1(149.22,74.3) v1(156.21,74.3) ; v1(163.19,56.52) v1(166.37,53.34)
SCL1: length 74.3
  TOP w0.254: R3.2 119.38,32.53 122.24,29.67 122.24,14.34 MCU3.SCL1 128.27,12.37 v1(137.16,3.48)
  BOTTOM w0.254: v1(137.16,3.48) 153.67,3.48 154.94,4.75 J2.9 ; MCU3.SCL1 MCU2.SCL1
SDA: length 115
  TOP w0.254: v1(158.75,71.75) 161.29,71.75 161.93,71.12 R2.2 v1(161.93,55.24) ; v1(151.13,71.75) 135.25,71.75 129.87,77.14 MCU3.SDA MCU2.SDA ; J2.20 167.64,49.53 v1(167,50.16)
  BOTTOM w0.254: v1(151.13,71.75) v1(158.75,71.75) ; v1(161.93,55.24) v1(167,50.16)
SDA1: length 48.4
  TOP w0.254: v1(136.53,7.29) 128.91,14.91 MCU3.SDA1
  BOTTOM w0.254: MCU3.SDA1 121.13,14.91 119.38,16.66 R4.2 117.6,14.91 MCU2.SDA1 ; v1(136.53,7.29) 156.21,7.29 J2.11
SPEEDOMETER: length 10.5
  BOTTOM w0.254: U3.A11 55.72,74.44 65.88,74.44 MCU2.A11
SPI_SS: length 93.8
  TOP w0.254: v1(140.18,88.57) 140.81,89.2 140.81,90.27 141.52,90.97 163.71,90.97 MCU3.53
  BOTTOM w0.254: MCU2.53 74.93,88.57 v1(140.18,88.57)
STEER_SERVO_PWM: length 131.7
  TOP w0.254: v1(73.03,9.53) 77.47,13.97 77.47,22.96 U1.17
  BOTTOM w0.254: v1(73.03,9.53) 72.39,8.89 34.29,8.89 27.94,2.54 6.99,2.54 3.81,5.71 3.81,38.52 6.61,41.33 U3.6
TX0: length 94.1
  TOP w0.254: v1(10.16,27.61) 10.16,51.99 8.12,54.03 U3.TX0
  BOTTOM w0.254: v1(10.16,27.61) 15.49,22.28 61.54,22.28 61.79,22.53 68.58,22.53 69.35,21.76 U1.19
TX3: length 87.6
  TOP w0.254: U3.TX3 14.22,61.65 15.24,60.63 v1(15.24,41.58)
  BOTTOM w0.254: U1.13 71.25,37 67.94,40.31 60.96,40.31 59.69,41.58 v1(15.24,41.58)
VOLTAGE_SWITCH: length 120.1
  TOP w0.254: U3.37 27.69,92.76 27.94,93.02 73.41,93.02 74.93,91.49 74.93,86.28 75.18,86.03 76.83,86.03 78.74,84.12 82.93,84.12 83.19,83.87 83.19,51.99 84.07,51.1 88.27,51.1 90.17,49.2 90.17,38.41 91.58,37 U2.13
WATCHDOG: length 148.5
  TOP w0.254: v1(76.2,7.62) 90.17,7.62 91.5,8.96 91.5,19.99 U2.19
  BOTTOM w0.254: U3.5 6.61,43.87 2.54,39.79 2.54,5.08 6.35,1.27 28.57,1.27 34.92,7.62 v1(76.2,7.62)
WHEELROTATION: length 82.2
  TOP w0.254: v1(123.19,81.58) 126.75,85.14 MCU3.22
  BOTTOM w0.254: v1(123.19,81.58) 98.42,81.58 86.36,69.52 86.36,67.23 86.11,66.98 MCU2.A8 60.01,66.98 59.75,66.73 U3.A8
N00469: length 7.2
  TOP w0.254: R13.2 18.41,76.5 ; 18.41,76.5 C14.1 ; 18.41,76.5 R14.2
N00471: length 4.3
  TOP w0.254: DS2.K 42.55,6.83
N00472: length 4.3
  TOP w0.254: DS1.K 36.83,6.83
N35866: length 3.2
  TOP w0.254: 46.35,44.76 48.22,44.76 48.38,44.6 R9.1
N35982: length 5.7
  TOP w0.254: 163.19,23.3 163.19,26.34 162.56,26.98 R7.1
N35986: length 5.7
  TOP w0.254: R8.1 149.86,26.98 149.22,26.34 149.22,23.3
N38622: length 3.2
  TOP w0.254: R30.1 162.04,38.89 161.89,39.04 IC3_2551.8
N38835: length 5.2
  BOTTOM w0.254: R32.1 83.82,73.97 83.19,74.6 IC4_2551.8

## Copper pours and planes (outline as drawn; the poured copper is in the pictures)
12V0 on TOP (solid shape): 25.4,32.38 37.47,32.38 37.47,31.11 35.56,29.21 33.02,29.21 32.38,29.84 27.3,29.84 26.67,29.21 22.23,29.21 22.23,34.92 19.05,34.92 19.05,37.47 25.4,37.47
GND on BOTTOM: 2,0.5 0.94,0.94 0.5,2 0.5,98 0.94,99.06 2,99.5 178,99.5 179.06,99.06 179.5,98 179.5,2 179.06,0.94 178,0.5 ; 39 cut-outs
PWRIN on TOP (solid shape): 26.67,21.59 23.06,17.98 23.06,17.47 20.63,17.47 19.05,19.05 19.05,25.4 19.68,26.04 26.67,26.04

## Text on the board
User.10: FIGURE | FINISHED_SIZE | 0.3302 | 0.63 | 0.7 | 0.8 | 0.8128 | 1.0 | 1.016 | 1.2 | 1.6 | 3.302 | 2.0 | 4.5 | DRILL CHART: TOP to BOTTOM | ALL UNITS ARE IN MILLIMETERS | TOLERANCE_DRILL | +0.0/-0.0 | +0.075/-0.075 | +0.05/-0.05 | PLATED | NON-PLATED | QTY | 356 | 2 | 20 | 12 | 62 | 286 | 40 | 4 | 3 | 6
